# Altium PCB PCB1.PcbDoc
Units mm, origin at the board's own origin, x right, y up, seen from the top; angles counter-clockwise.
Board outline 152.4 x 101.6 mm, 2 copper layers (Top Layer, Bottom Layer); 10 components, 13 nets, 34 pads, 0 vias.
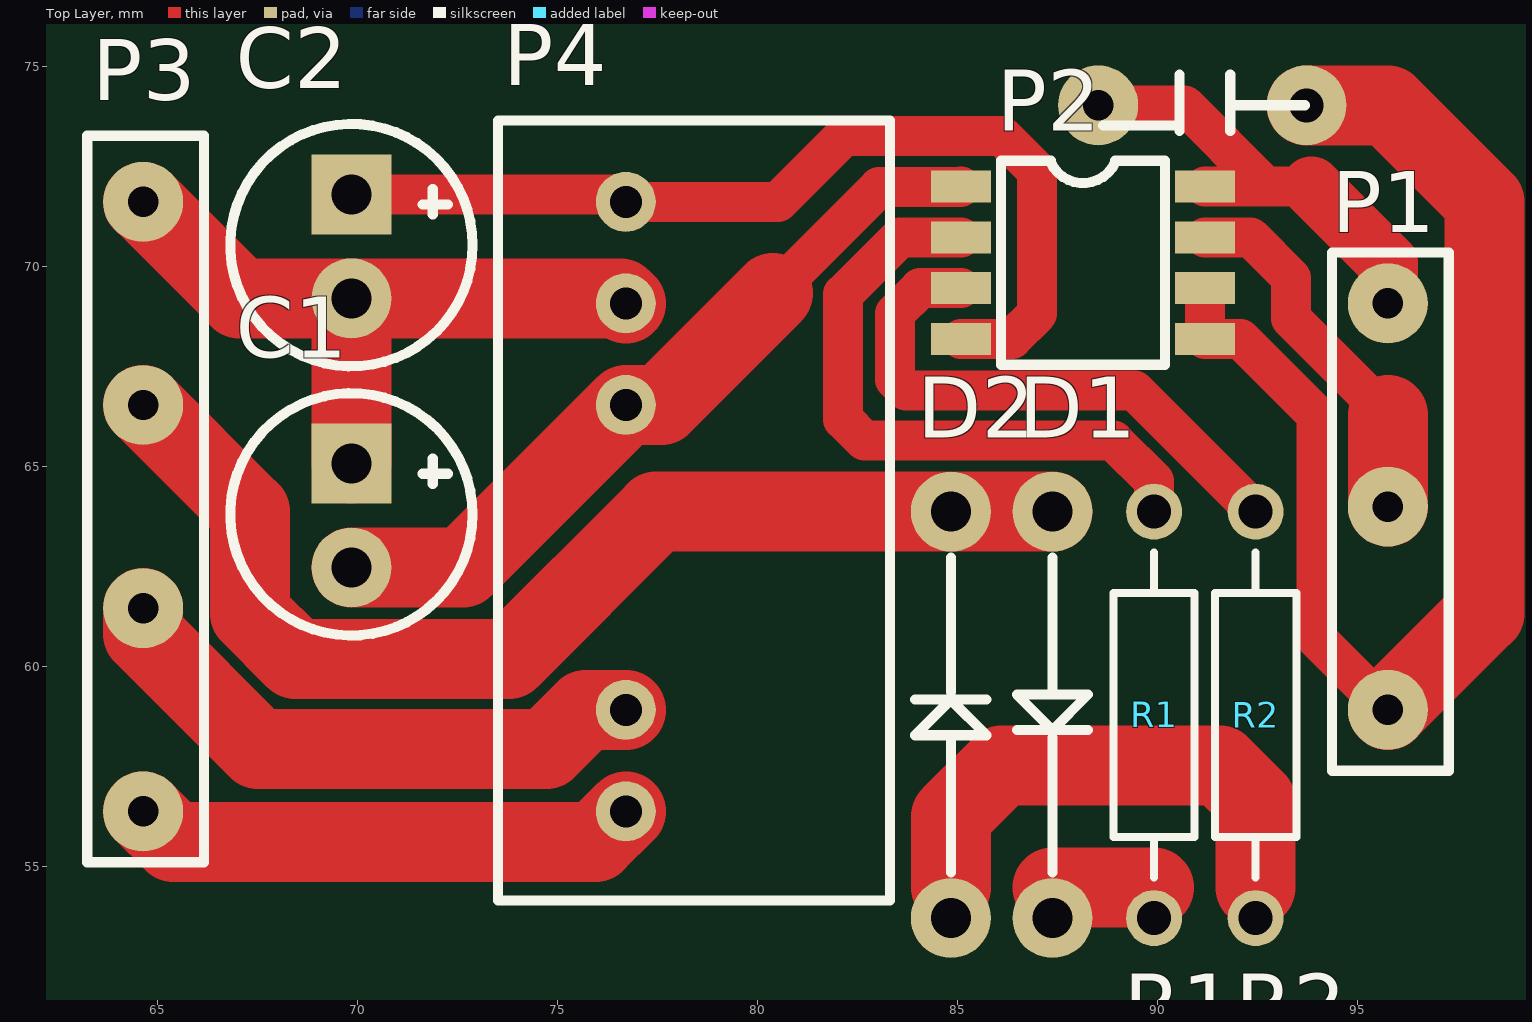
[diagram p0: Top Layer view]
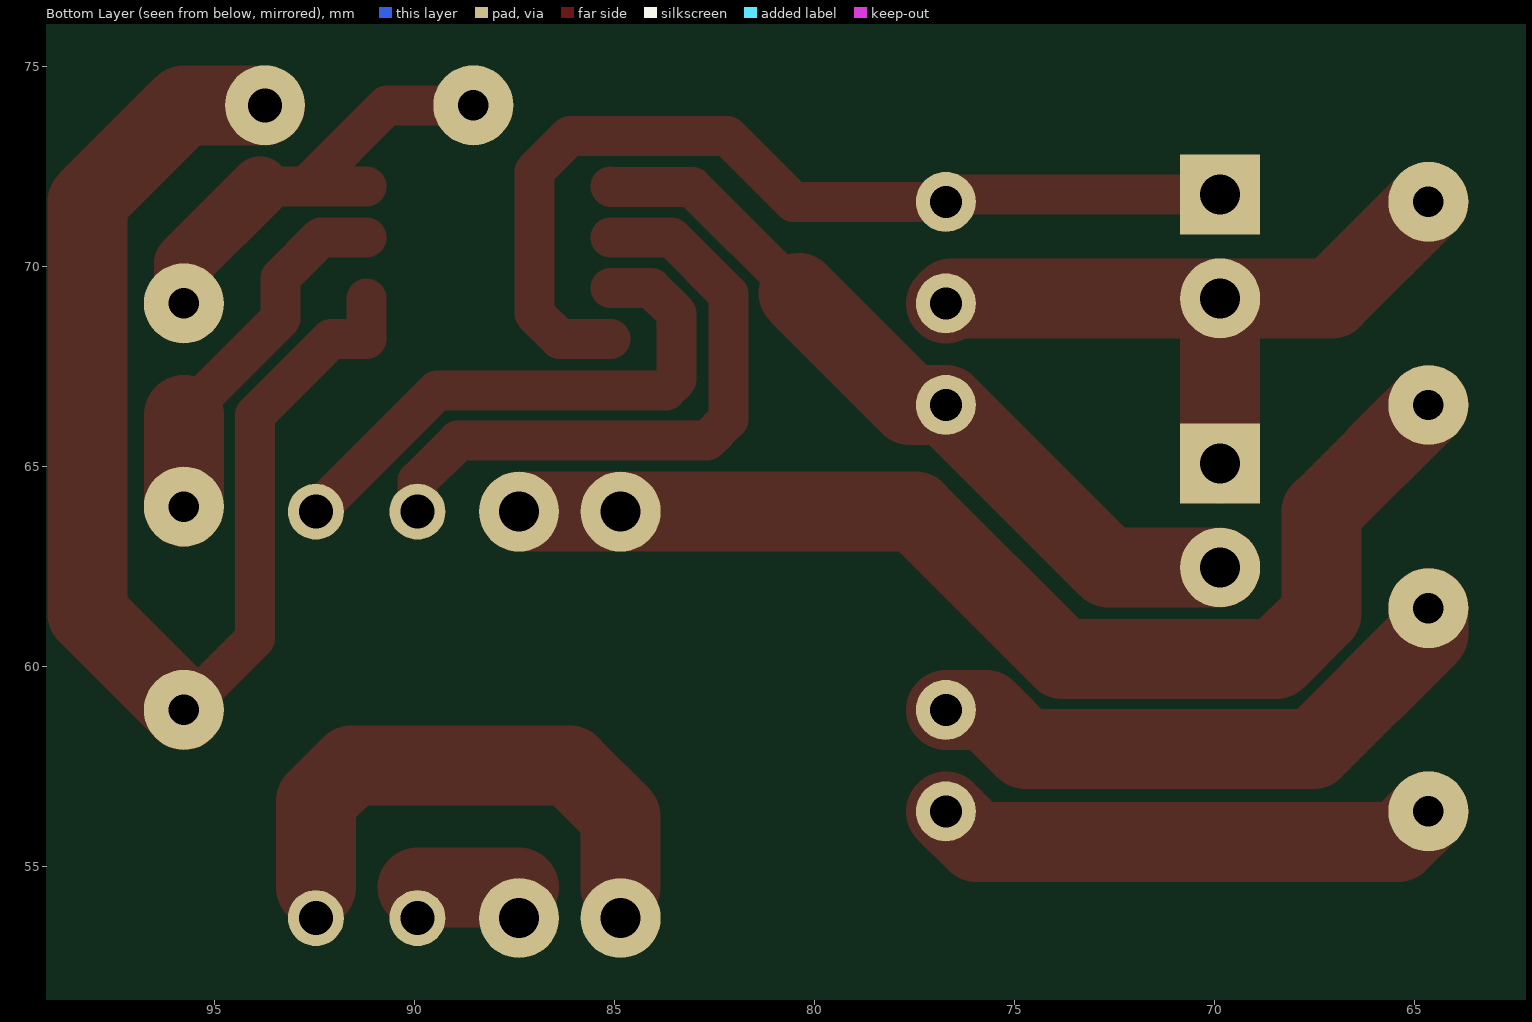
[diagram p1: Bottom Layer view, seen from below]

## Layer stack, top to bottom
Top Solder: solder mask 0.0102, Solder Resist, Dk 3.5
Top Layer: signal copper 0.0356
Dielectric 1: dielectric 0.32, FR-4, Dk 4.8
Bottom Layer: signal copper 0.0356
Bottom Solder: solder mask 0.0102, Solder Resist, Dk 3.5

## Board outline
25.4,25.4 177.8,25.4 177.8,127 25.4,127

## Design rules (kind name [scope] priority, off if disabled: settings)
Clearance [All] p1: gap=0.254 ignorepadtopadclearanceinfootprint=FALSE except(0: Arc-Hole Track-Hole SMDPad-Hole THPad-Hole Via-Hole Fill-Hole Poly-Hole Region-Hole Text-Hole)
PolygonConnect [All] p1: connectstyle=Relief reliefconductorwidth=0.254 reliefentries=4 polygonreliefangle="90 Angle" airgapwidth=0.254
RoutingVias [All] p1: holewidth=0.711 width=1.27 viastyle="Through Hole" minholewidth=0.711 minwidth=1.27 maxholewidth=0.711 maxwidth=1.27
SolderMaskExpansion [All] p1: expansion=0.102
Width [All] p1: maxlimit=4 minlimit=0.254 preferedwidth=0.254
30 further rules are at their usual default settings.

## Components (designator, comment, footprint, x,y, rotation, side; value= is the part's Value field where it differs from the comment)
C1 "Cap Pol1" C-10uF 69.85,65.084 r270 top value=1uF
C2 "Cap Pol1" C-10uF 69.85,71.815 r270 top value=1uF
D1 "D Schottky" Diode 87.376,63.881 r270 top
D2 "D Schottky" Diode 84.836,53.721 r90 top
P1 "Header 3" 3_DuanZi 95.758,69.088 r270 top
P2 "1EDI60N12AF" sop-8 88.138,70.104 r270 top
P3 "Header 4" 4_DuanZi 64.643,61.341 r90 top locked
P4 "DC/DC_Mokuai" DC/DC_MoKuai 76.708,56.388 r0 top
R1 "Res2" AXIAL-0.4 89.916,58.801 r270 top value=3.3
R2 "Res2" AXIAL-0.4 92.456,58.801 r270 top value=10

## Footprints (in the part's own frame and the unit in brackets; to place one, negate y for a bottom-side part, rotate by r counter-clockwise, add the part's x,y. Pads: shape width x height; smd on the part's side, far side on the other; paste and mask are expansions set on the pad)
3_DuanZi [mm]
  round 2 hole 0.762: 1(0,0) 2(5.08,0) 3(10.16,0)
  silkscreen extent -1.27,-1.4 11.68,1.52
4_DuanZi [mm]
  round 2 hole 0.762: 1(-4.953,0) 2(0.127,0) 3(5.207,0) 4(10.287,0)
  silkscreen extent -6.22,-1.52 11.94,1.4
AXIAL-0.4 [mm] "Axial Device, Thru-Hole; 2 Leads; 0.4 in Pin Spacing"
  round 1.4 hole 0.85: 1(-5.08,0) 2(5.08,0)
  silkscreen extent -4.06,-1.02 4.06,1.02
C-10uF [mm]
  rect 2x2 hole 1: 1(0,0)
  round 2 hole 1: 2(2.6,0)
  silkscreen extent -1.76,-3.03 4.3,3.03
DC/DC_MoKuai [mm]
  round 1.5 hole 0.8: 1(0,0) 2(0,2.54) 3(0,10.16) 4(0,12.7) 5(0,15.24)
  silkscreen extent -3.2,-2.23 6.6,17.27
Diode [mm]
  round 2 hole 1: 1(0,0) 2(10.16,0)
  silkscreen extent 1.14,-0.89 9.02,0.89
sop-8 [mm]
  rect 0.8x1.5 smd: 1(-1.905,3.048) 2(-0.635,3.048) 3(0.635,3.048) 4(1.905,3.048) 5(1.905,-3.048) 6(0.635,-3.048) 7(-0.635,-3.048) 8(-1.905,-3.048)
  silkscreen extent -2.55,-2.05 2.55,2.05

## Part data
C1 C2: "Polarized Capacitor (Radial)", LatestRevisionDate=17-Jul-2002, LatestRevisionNote="Re-released for DXP Platform.", PackageDescription="Polarized Capacitor (Radial); 2 Leads", PackageReference=RB7.6-15, Published=8-Jun-2000, Publisher="Altium Limited"
D1 D2: "Schottky Diode", Code_JEDEC=DO-214-AA, LatestRevisionDate=17-Jul-2002, LatestRevisionNote="Re-released for DXP Platform.", PackageDescription="DO-214-AA/SMB; 2 C-Bend Leads; Body 5.3 x 3.6 mm, inc. leads (LxW)", PackageReference=SMB, Published=8-Jun-2000, Publisher="Altium Limited"
P1: "Header, 3-Pin", LatestRevisionDate=17-Jul-2002, LatestRevisionNote="Re-released for DXP Platform.", Publisher="Altium Limited"
P3: "Header, 4-Pin", LatestRevisionDate=17-Jul-2002, LatestRevisionNote="Re-released for DXP Platform.", Publisher="Altium Limited"
R1 R2: "Resistor", LatestRevisionDate=17-Jul-2002, LatestRevisionNote="Re-released for DXP Platform.", PackageDescription="Axial Device, Thru-Hole; 2 Leads; 0.4 in Pin Spacing", PackageReference=AXIAL-0.4, Published=8-Jun-2000, Publisher="Altium Limited"

## Free pads (board coordinates)
  round 2 hole 0.762: 34(88.519,74.041)
  round 2 hole 0.85: 35(93.726,74.041)

## Nets (pads, with @x,y where several pads share a name; then routed paths per layer and width w, separated by ;. In a path a pad name is that pad's centre, name@x,y a point inside that pad or via, vN(x,y) a via of type N, cw(c..) or ccw(c..) an arc to the next point about the centre after c; other vN are vias at no path point)
3.3V-DSP: P1.1 P2.1 pad.34 | length 11.4
  Top Layer w1: pad.34 90.678,74.041 92.71,72.009 ; P2.1 92.71,72.009 ; 93.853,72.009 92.71,72.009
  Top Layer w1.5: 93.853,72.009 95.758,70.104 P1.1
15V: P3.1 P4.1 | length 12.7
  Top Layer w2: P3.1 65.405,55.626 75.946,55.626 P4.1
20V: C2.1 P2.5 P4.5 | length 24
  Top Layer w1: C2.1 76.521,71.815 P4.5 80.518,71.628 82.169,73.279 86.106,73.279 86.995,72.39 86.995,68.834 86.36,68.199 P2.5
-4V: C1.2 P2.8 P4.3 | length 19.2
  Top Layer w1: 80.391,69.342 83.042,71.993 85.074,71.993 P2.8
  Top Layer w2: C1.2 72.644,62.484 P4.3 77.597,66.548 80.391,69.342
DSP-PWM1: P1.2 P2.2 | length 9.3
  Top Layer w1: P2.2 92.329,70.739 93.345,69.723 93.345,68.707 95.758,66.294
  Top Layer w2: P1.2 95.758,66.294
GND: P1.3 P2.3 P2.4 pad.35 | length 31.8
  Top Layer w1: P2.3@91.186,69.215 P2.4 92.075,68.199 93.98,66.294 93.98,60.706 P1.3
  Top Layer w2: pad.35 95.758,74.041 98.171,71.628 98.171,61.341 P1.3
GND2: P3.2 P4.2 | length 14.3
  Top Layer w2: P3.2 64.643,60.82 67.519,57.944 74.721,57.944 75.705,58.928 P4.2
GS: C1.1 C2.2 P3.4 P4.4 | length 17.2
  Top Layer w2: P3.4 67.056,69.215 C2.2 ; C1.1 C2.2 ; P4.4 76.581,69.215 C2.2
NetD1_1: D1.2 R1.2 | length 2.5
  Top Layer w2: D1.2@87.376,54.483 89.916,54.483
NetD2_2: D2.1 R2.2 | length 12.5
  Top Layer w2: D2.1@84.836,54.483 84.836,56.261 86.106,57.531 91.567,57.531 92.456,56.642 92.456,54.483
NetP2_6: P2.6 R2.1 | length 14
  Top Layer w1: P2.6 84.069,69.469 83.439,68.839 83.439,67.183 83.709,66.913 89.424,66.913 R2.1
NetP2_7: P2.7 R1.1 | length 15.8
  Top Layer w1: P2.7 83.566,70.739 82.145,69.318 82.145,66.191 82.677,65.659 88.9,65.659 89.916,64.643 R1.1
PWM1: D1.1 D2.2 P3.3 | length 28.4
  Top Layer w2: P3.3 67.31,63.881 67.31,61.341 68.453,60.198 73.787,60.198 77.47,63.881 D2.2 D1.1

## Silkscreen, mask and mechanical layers (free items; w line width, h text height)
Top Overlay:
  lines w0.254: 88.646,73.533 90.043,73.533 90.551,73.533 ; 90.551,73.406 90.551,74.803 ; 91.821,73.406 91.821,74.803 ; 91.948,74.041 93.686,74.041
  text "不能镜像打印" at 72.644,77.724 h3